# EAGLE board eCog106_BLED (EAGLE 6.6.0)
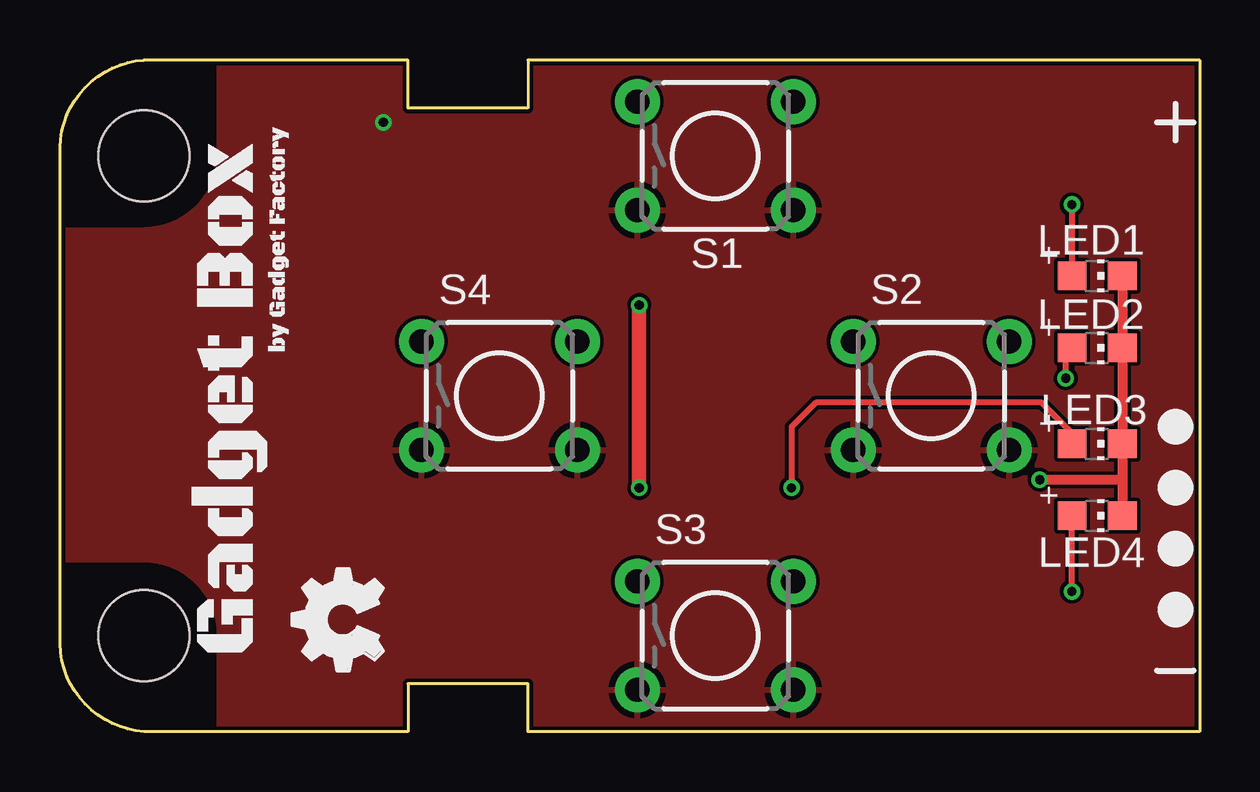
[diagram p0: board, top side]
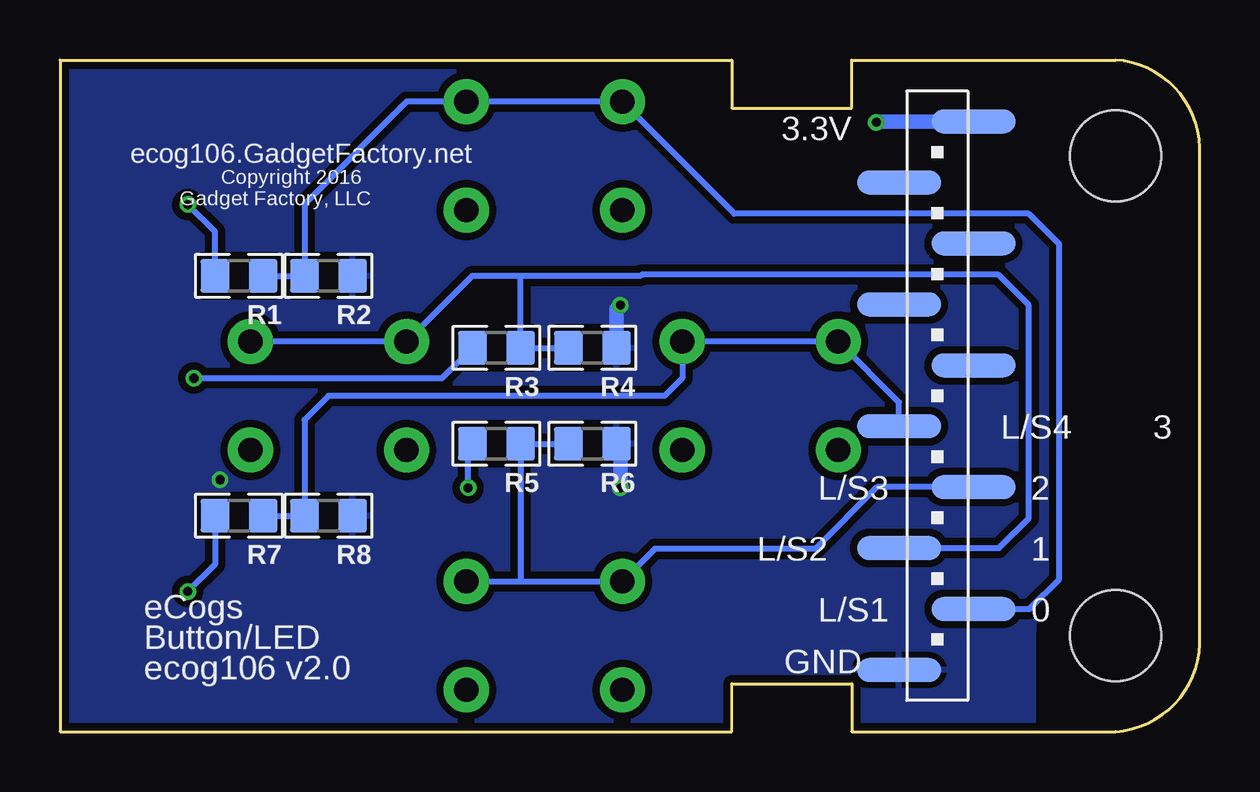
[diagram p1: board, bottom side, seen from below]

Size 47.51 x 28 mm. Coordinates in mm from the lower left corner, seen from the top.
Copper layers (1*16): Top 0.035mm / dielectric 1.5mm / Bottom 0.035mm
Design rules "hackvana *": minimum track width 6mil, minimum drill 0.3mm, track to track 6mil, track to pad 6mil, pad to pad 6mil, via to via 6mil, smd to smd 0mil, copper to edge 6mil, drill to drill 6mil, minimum pad ring 10mil, minimum via ring 6mil, stop-mask expansion 2mil, vias tented up to drill 100mil, thermal gap 10mil

## Footprints (pad centres in the part's own frame; a part is rotated, then mirrored left to right if it is on the bottom)
ECOG_GENERAL_SMD = smd 3.5 x 1 bottom: 3V3 9.923,25.429; G0 9.923,5.111; G1 13.022,7.649; G2 9.923,10.189; G3 13.022,12.729; G4 9.923,15.269; G5 13.022,17.809; G6 9.923,20.349; G7 13.022,22.889; GND 13.022,2.571 | hole 3.8: 4,24; 4,4
CHIP-LED0805 = smd 1.2 x 1.2: A 0,-1.05; C 0,1.05
0805 = smd 1.2 x 1.4: 1 -1,0; 2 1,0
TACTILE-PTH = drill 1.016 pad 1.88: 1 -3.251,2.261; 2 3.251,2.261; 3 -3.251,-2.261; 4 3.251,-2.261

## Placement (x,y rotation side)
ECOG  ECOG_GENERAL_ROWECOG_GENERAL_SMD  [ECOG_GENERAL_SMD]  -0.49,0 0 top
LED1  [CHIP-LED0805]  43.24,19 270 top
LED2  [CHIP-LED0805]  43.24,16 270 top
LED3  [CHIP-LED0805]  43.24,12 270 top
LED4  [CHIP-LED0805]  43.24,9 270 top
R1  390  [0805]  40.05,19 180 bottom
R2  10K  [0805]  36.32,19 180 bottom
R3  390  [0805]  29.32,16 180 bottom
R4  10K  [0805]  25.32,16 180 bottom
R5  390  [0805]  29.32,12 180 bottom
R6  10K  [0805]  25.32,12 180 bottom
R7  390  [0805]  40.05,9 180 bottom
R8  10K  [0805]  36.32,9 180 bottom
S1  [TACTILE-PTH]  27.32,24 0 top
S2  [TACTILE-PTH]  36.32,14 0 top
S3  [TACTILE-PTH]  27.32,4 0 top
S4  [TACTILE-PTH]  18.32,14 0 top
U$1  [LEGEND_DIO]  46.5,12.7 0 top
U$2  [LEGEND_DIO]  46.5,10.16 0 top
U$3  [LEGEND_DIO]  46.5,7.62 0 top
U$4  [LEGEND_DIO]  46.5,5.08 0 top
U$5  [GADGETBOX_SMALL]  7.13,13.97 90 top
U$6  [OSHW_FILLX150_NOTEXT]  13.48,2.54 90 top

## Library data of the parts
ECOG = eCogs; DIGIKEY: S1013EC-10-ND
LED1-LED4 = adafruit; DIGIKEY: 475-1410-2-ND
R1 R3 R5 R7 = GadgetFactory; DIGIKEY: RMCF0805JT390RCT-ND
R2 R4 R6 R8 = GadgetFactory; DIGIKEY: RMCF0805JT10K0CT-ND
S1-S4 = SparkFun; DIGIKEY: 679-2428-ND
U$1-U$4 = eCogs
U$5 = GadgetFactory
U$6 = ohw-logo

## Nets
1: ECOG.G0 R1.1 R2.2 S1.1 S1.2
2: ECOG.G1 R3.1 R4.2 S2.1 S2.2
3: ECOG.G2 R5.1 R6.2 S3.1 S3.2
3V3: ECOG.3V3 S1.3 S1.4 S2.3 S2.4 S3.3 S3.4 S4.3 S4.4
4: ECOG.G3 R7.1 R8.2 S4.1 S4.2
GND: ECOG.GND LED1.C LED2.C LED3.C LED4.C R2.1 R4.1 R6.1 R8.1
N$1: LED1.A R1.2
N$2: LED2.A R3.2
N$3: LED3.A R5.2
N$4: LED4.A R7.2

## Tracks (layer width: path | path; a pad name or v marks a point on that pad's centre or on a via)
1
  Bottom 0.254: R1.1 R2.2 37.32,22 33.06,26.26 S1.2 S1.1 19.4,21.59 7.13,21.59 5.86,20.32 5.86,6.35 7.1,5.11 ECOG.G0
2
  Bottom 0.254: R4.2 R3.1 28.32,19 | 28.32,19 23.32,19 23.27,19.05 8.4,19.05 7.13,17.78 7.13,8.89 8.37,7.65 ECOG.G1 | 28.32,19 30.33,19 S2.1 S2.2
3
  Bottom 0.254: R6.2 R5.1 28.32,6.26 | S3.2 28.32,6.26 | 28.32,6.26 S3.1 22.71,7.62 16.02,7.62 13.45,10.19 ECOG.G2
3V3  (via drill 0.38)
  Bottom 0.61: ECOG.3V3 13.45,25.43 v13.48,25.4
  pour Top: -1.49,29 48.51,29 48.51,-1 -1.49,-1
4
  Bottom 0.254: R7.1 R8.2 37.32,13 36.32,14 22.32,14 21.57,14.75 S4.2 S4.1 12.53,13.72 ECOG.G3
GND  (via drill 0.38)
  Top 0.406: LED1.C LED2.C LED3.C 44.29,10.48 | 44.29,10.48 LED4.C | 44.29,10.48 40.86,10.48 v40.84,10.5
  Top 0.61: v24.15,17.78 v24.15,10.16
  Bottom 0.61: R4.1 24.32,17.61 v24.15,17.78 | v24.15,10.16 24.15,11.83 R6.1
  pour Bottom (isolate 0.305): -2.49,30 49.51,30 49.51,-2 -2.49,-2
N$1  (via drill 0.38)
  Top 0.254: v42.18,21.97 LED1.A
  Bottom 0.254: R1.2 41.05,20.84 v42.18,21.97
N$2  (via drill 0.38)
  Top 0.254: v41.93,14.73 41.93,15.74 LED2.A
  Bottom 0.254: v41.93,14.73 31.59,14.73 R3.2
N$3  (via drill 0.38)
  Top 0.254: LED3.A 42.63,12 40.91,13.72 31.51,13.72 30.5,12.7 v30.5,10.16
  Bottom 0.254: v30.5,10.16 30.5,11.82 R5.2
N$4  (via drill 0.38)
  Top 0.254: v42.18,5.84 LED4.A
  Bottom 0.254: R7.2 41.05,6.97 v42.18,5.84

## Text on the board
bPlace: 3.3V | ecog106.GadgetFactory.net | Copyright 2016 | Gadget Factory, LLC | 3 | L/S4 | 2 | L/S3 | 1 | L/S2 | 0 | L/S1 | eCogs | Button/LED | GND | ecog106 v2.0